# Altium PCB main.PcbDoc
Units mm, origin at the board's own origin, x right, y up, seen from the top; angles counter-clockwise.
Board outline 70 x 55 mm, 2 copper layers (Top Layer, Bottom Layer); 39 components, 31 nets, 118 pads, 29 vias.
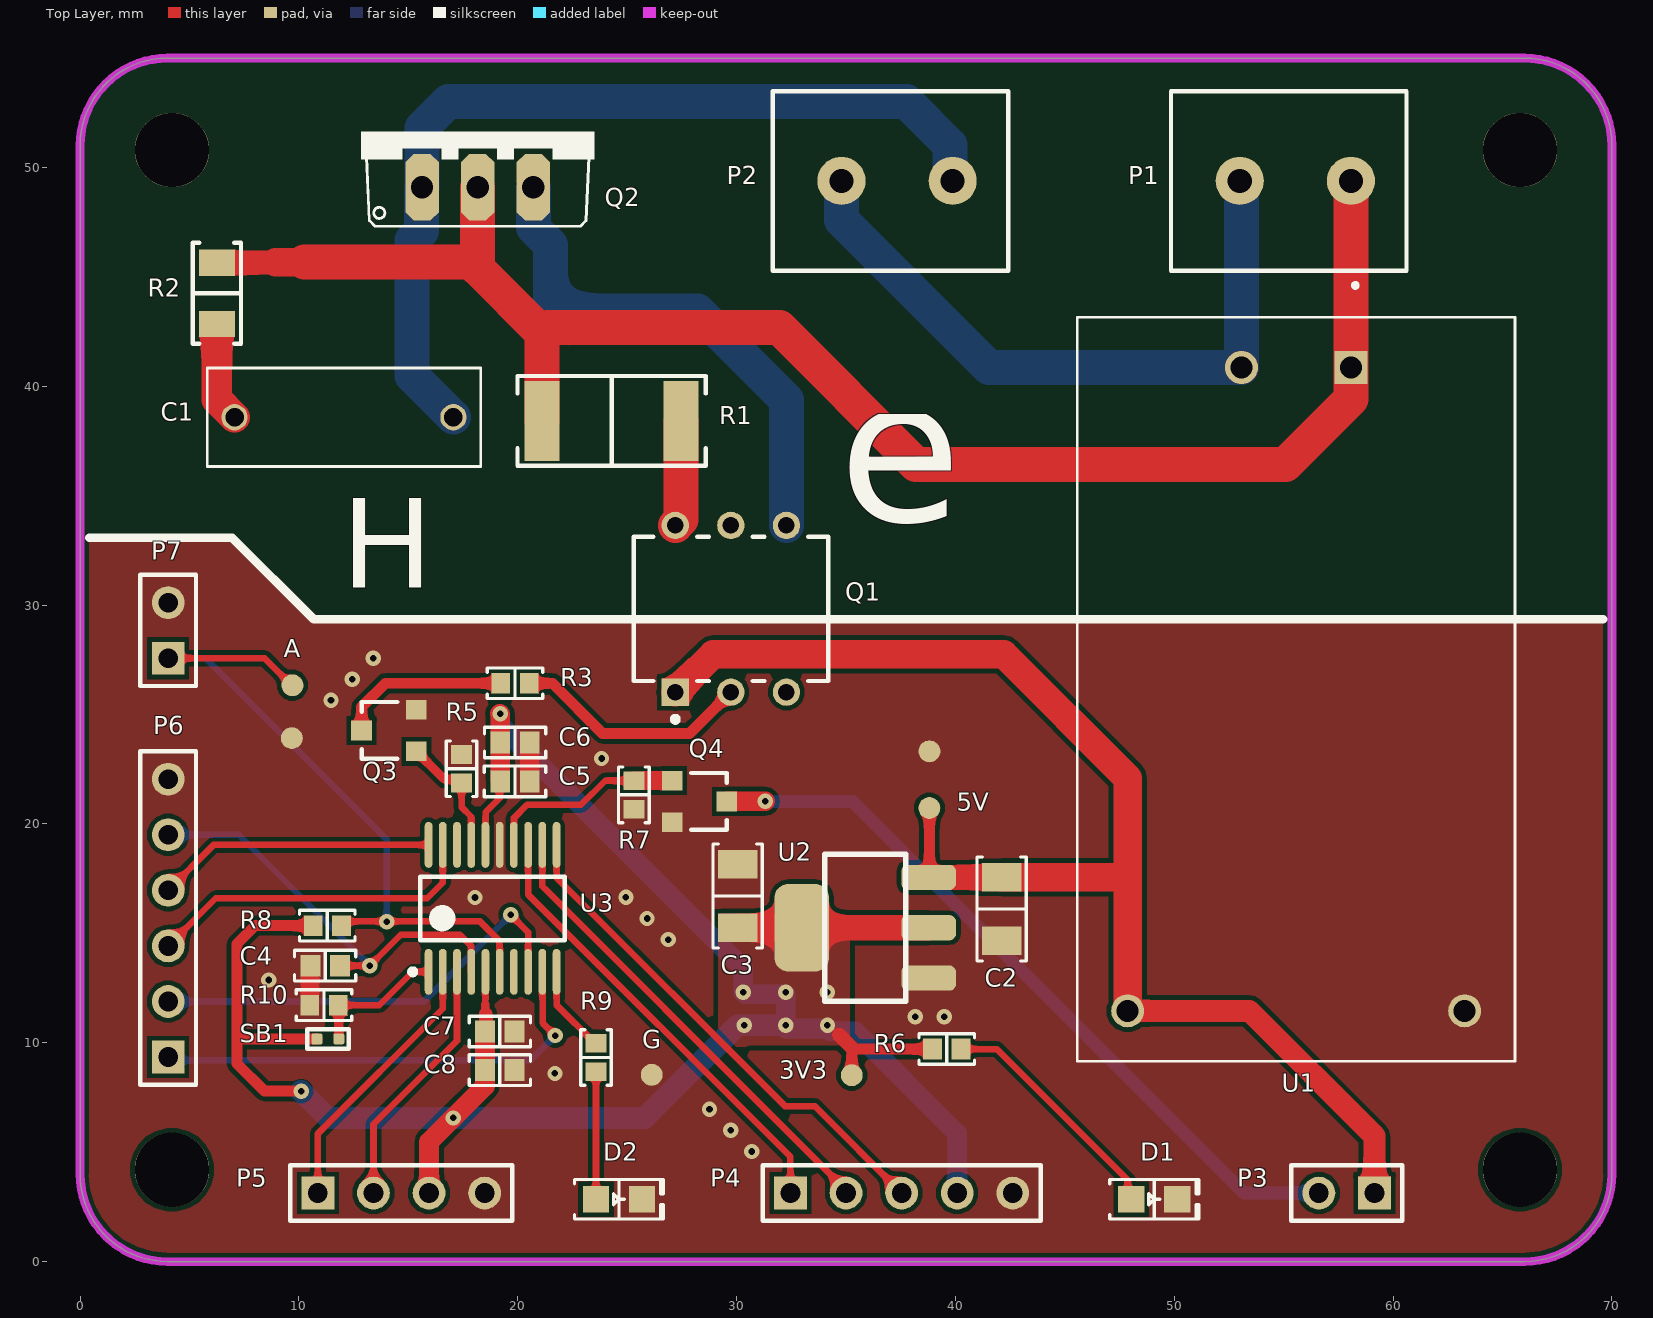
[diagram p0: Top Layer view]
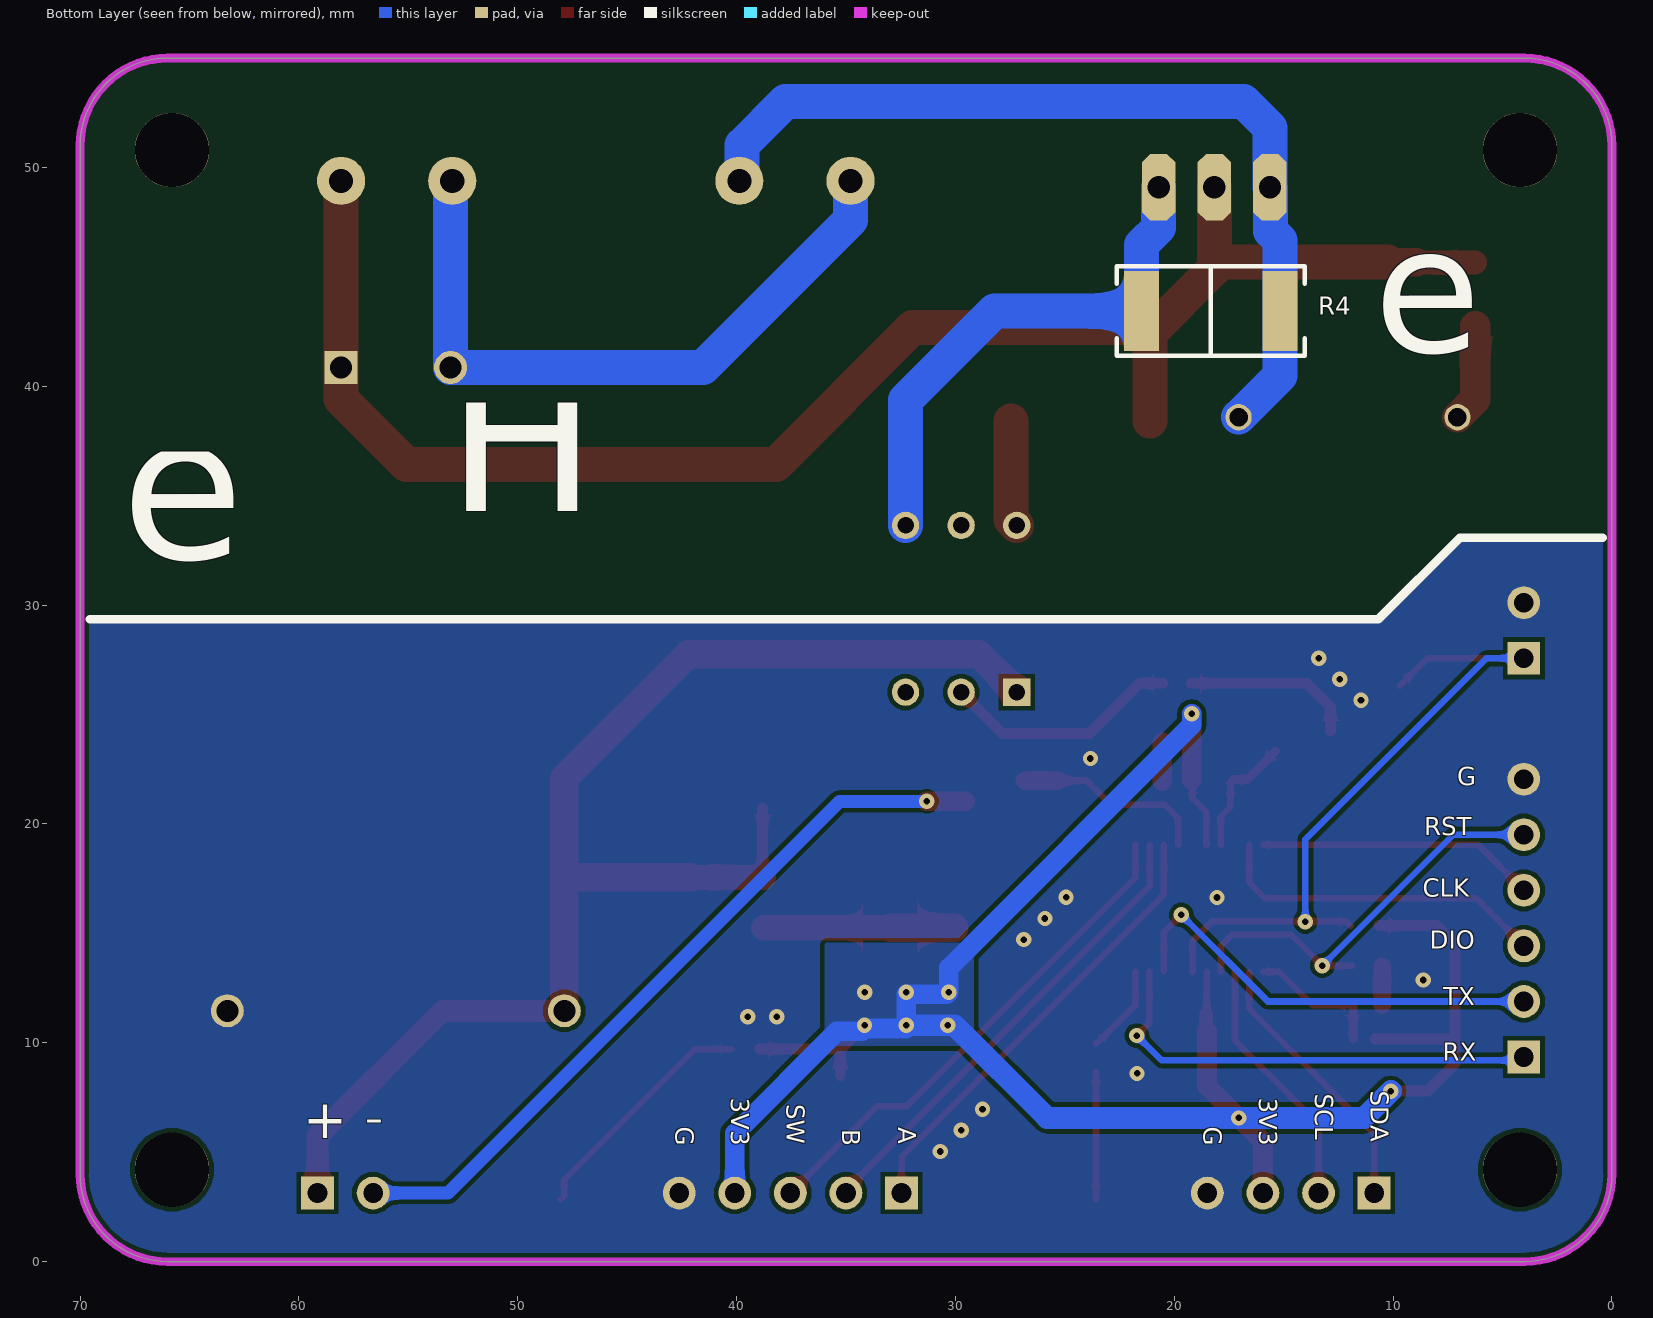
[diagram p1: Bottom Layer view, seen from below]
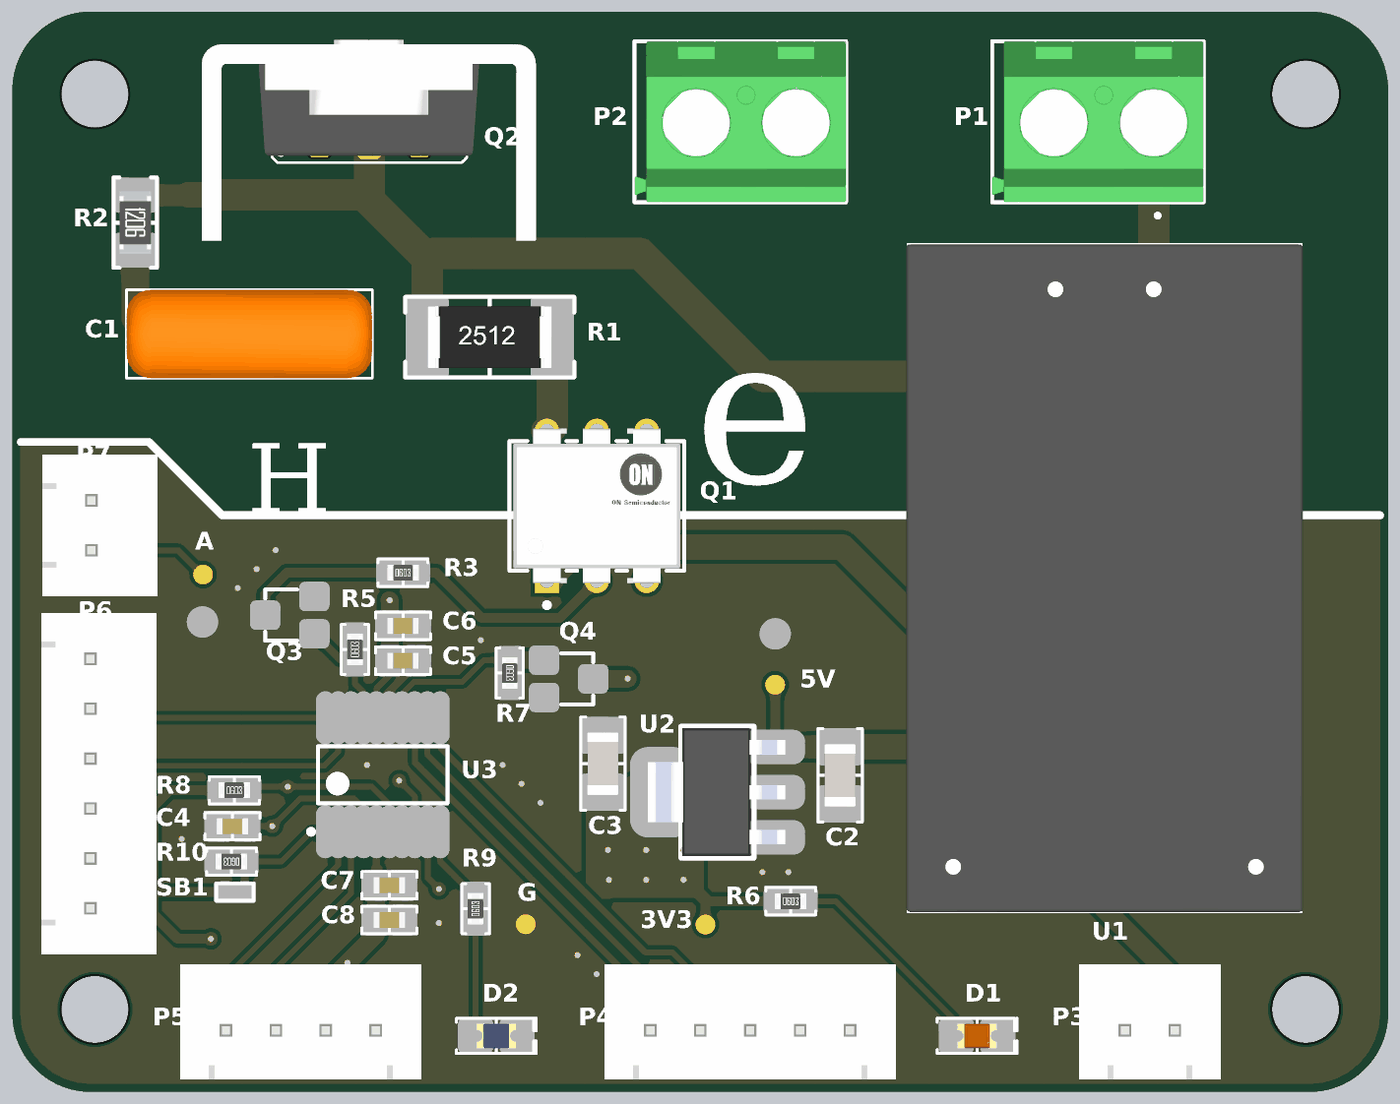
[diagram p2: 3D render of the assembled board from above, using the file's embedded part models]

## Layer stack, top to bottom
Top Solder: solder mask 0.0102, Solder Resist, Dk 3.5
Top Layer: signal copper 0.0356
Dielectric 1: dielectric 0.32, FR-4, Dk 4.8
Bottom Layer: signal copper 0.0356
Bottom Solder: solder mask 0.0102, Solder Resist, Dk 3.5

## Board outline
4,0 cw(c4,4) 0,4 0,51 cw(c4,51) 4,55 66,55 cw(c66,51) 70,51 70,4 cw(c66,4) 66,0

## Design rules (kind name [scope] priority, off if disabled: settings)
Clearance [All] p1: gap=0.2 ignorepadtopadclearanceinfootprint=FALSE
ComponentClearance ComponentClearance_1 [All] p1: gap=0.254 collisioncheckmode=3 verticalgap=0.254 showdistances=FALSE
HoleSize [All] p1: absolutevalues=TRUE maxlimit=10 minlimit=0.025 maxpercent=80.000 minpercent=20.000
MinimumSolderMaskSliver [All] p1: minsoldermaskwidth=0.075
PasteMaskExpansion [All] p1: expansion=0.3
PlaneConnect [All] p1: planeconnectstyle=Direct reliefexpansion=0.508 reliefentries=4 reliefconductorwidth=0.254 reliefairgap=0.254
PolygonConnect [All] p1: connectstyle=Direct reliefconductorwidth=0.254 reliefentries=4 polygonreliefangle="90 Angle" airgapwidth=0.254
RoutingCorners [All] p1: cornerstyle=45-Degree minsetback=2 maxsetback=2
RoutingVias [All] p1: holewidth=0.3 width=0.7 viastyle="Through Hole" minholewidth=0.25 minwidth=0.6 maxholewidth=0.4 maxwidth=1.27
SilkToSilkClearance [All] p1: silktosilkclearance=0.2
SilkToSolderMaskClearance [IsText] p1: minsilkscreentomaskgap=0.17 clearancetoexposedcopper=TRUE
SolderMaskExpansion [All] p1: expansion=0.102 istentingtop=FALSE
UnConnectedPin [All] p1:
UnRoutedNet [All] p1: checkbadconnections=TRUE
Width [All] p1: maxlimit=5 minlimit=0.2 preferedwidth=0.3 minimp=50.000000 maximp=50.000000 favimp=50.000000
21 further rules are at their usual default settings.

## Components (designator, comment, footprint, x,y, rotation, side; value= is the part's Value field where it differs from the comment)
3V3 "TP_NOBOM" PAD_RND_1MM 35.263,8.521 r90 top (schematic designator TP3)
5V "TP_NOBOM" PAD_RND_1MM 38.81,20.731 r45 top (schematic designator TP1)
A "TP_NOBOM" PAD_RND_1MM 9.704,26.339 r90 top (schematic designator TP4)
C1 "0.01u" CAPRR1000W60L1250T450H750 12.058,38.588 r0 top
C2 "10u" "CAP 1206_3216 - 0.8MM" 42.116,16.119 r270 top value="10 µF"
C3 "22u" "CAP 1206_3216 - 0.8MM" 30.046,16.709 r90 top value="22 µF"
C4 "0.1u" "CAP 0603_1608" 11.2,13.525 r180 top value="0.1 µF"
C5 "0.1u" "CAP 0603_1608" 19.875,21.95 r0 top value="0.1 µF"
C6 "4.7u" "CAP 0603_1608" 19.876,23.725 r0 top value="4.7 µF"
C7 "1u" "CAP 0603_1608" 19.18,10.52 r0 top value="1 µF"
C8 "0.01u" "CAP 0603_1608" 19.18,8.752 r0 top value="10000 pF"
D1 "Red" "LED 0805_2012 RED" 49.085,2.853 r0 top
D2 "Blue" "LED 0805_2012 BLUE" 24.626,2.853 r0 top
G "TP_NOBOM" PAD_RND_1MM 26.121,8.538 r45 top (schematic designator TP2)
P1 "282837-2" "TE 282837-2" 55.532,49.39 r180 top
P2 "282837-2" "TE 282837-2" 37.334,49.39 r180 top
P3 "Header 2" HDR1X2 59.149,3.136 r180 top
P4 "Header 5" HDR1X5 32.462,3.136 r0 top
P5 "Header 4" HDR1X4 10.866,3.136 r0 top
P6 "Header 6" HDR1X6 4.025,9.349 r90 top
P7 "Header 2" HDR1X2 4.025,27.575 r90 top
Q1 "MOC3041M" FP-646BX-MFG 29.738,29.835 r90 top
Q2 "BT138" MY_TO220V_HEATSINK 18.17,51.634 r0 top
Q3 "AO3400" AO-SOT23-3_V 14.116,24.273 r90 top
Q4 "AO3400" AO-SOT23-3_V 28.305,21.031 r270 top
R1 "360" "RES 2512_6432" 24.291,38.424 r0 top value="360 Ohms"
R2 "39" "RES 1206_3216" 6.251,44.253 r270 top value="39 Ohms"
R3 "100" "RES 0603_1608" 19.875,26.431 r0 top value="100 Ohms"
R4 "360" "RES 2512_6432" 18.331,43.439 r180 bottom value="360 Ohms"
R5 "10k" "RES 0603_1608" 17.431,22.525 r90 top value="10 kOhms"
R6 "1k" "RES 0603_1608" 39.604,9.715 r0 top value="1 kOhms"
R7 "10k" "RES 0603_1608" 25.308,21.331 r270 top value="10 kOhms"
R8 "100k" "RES 0603_1608" 11.297,15.354 r0 top value="100 kOhms"
R9 "1k" "RES 0603_1608" 23.576,9.327 r90 top value="1 kOhms"
R10 "10k" "RES 0603_1608" 11.15,11.722 r180 top value="10 kOhms"
SB1 "Solder Jumper" SOLDERJUMPER_SINGLE 11.325,10.175 r0 top
U1 "HLK-PM01" CONV_HLK-PM01 55.572,26.161 r270 top
U2 "AMS1117-3.3V" SOT-223 37.732,15.259 r90 top
U3 "STM32F070F6P6" STM-TSSOP20_M 18.849,16.146 r90 top

## Footprints (in the part's own frame and the unit in brackets; to place one, negate y for a bottom-side part, rotate by r counter-clockwise, add the part's x,y. Pads: shape width x height; smd on the part's side, far side on the other; paste and mask are expansions set on the pad)
AO-SOT23-3_V [mm]
  rect 0.9x0.95 smd: 1(-0.95,-1.25) 2(0.95,-1.25) 3(0,1.25)
  silkscreen extent -1.3,-0.38 1.3,1.25, body extent -1.14,-1.25 1.17,1.36, height 1.25
"CAP 0603_1608" [mm]
  rect 0.9x1 smd: 1(-0.675,0) 2(0.675,0)
  silkscreen extent -1.4,-0.7 1.4,0.7, body extent -0.8,-0.41 0.8,0.41, height 0.82
"CAP 1206_3216 - 0.8MM" [mm]
  rect 1.3x1.8 smd: 1(-1.45,0) 2(1.45,0)
  silkscreen extent -2.37,-1.12 2.37,1.12, body extent -1.6,-0.8 1.6,0.8, height 0.8
CAPRR1000W60L1250T450H750 [mm]
  round 1.2 hole 0.85: 1(-5,0) 2(5,0)
  silkscreen extent -6.25,-2.25 6.25,2.25, body extent -6.25,-2.25 6.25,2.25, height 8.5
CONV_HLK-PM01 [mm]
  rect 1.508x1.508 hole 1: 1(-14.7,2.5)
  round 1.508 hole 1: 2(-14.7,-2.5) 3(14.7,7.7) 4(14.7,-7.7)
  silkscreen extent -18.55,-10 17,10, body extent -17,-10.1 17,10.1, height 15
FP-646BX-MFG [mm]
  rect 1.25x1.25 hole 0.75 paste-1000 mask+0: 1(-3.81,2.54)
  round 1.25 hole 0.75 paste-1000 mask+0: 2(-3.81,0) 3(-3.81,-2.54) 4(3.81,-2.54) 5(3.81,0) 6(3.81,2.54)
  silkscreen extent -5.17,-4.44 3.3,4.44, body extent -4.53,-4.54 4.53,4.54, height 0.25
HDR1X2 [mm]
  rect 1.5x1.5 hole 0.9: 1(0,0)
  round 1.5 hole 0.9: 2(2.54,0)
  silkscreen extent -1.27,-1.27 3.81,1.27, body extent -2.34,-3.35 4.88,2.49, height 7.44
HDR1X4 [mm]
  rect 1.5x1.5 hole 0.9: 1(0,0)
  round 1.5 hole 0.9: 2(2.54,0) 3(5.08,0) 4(7.62,0)
  silkscreen extent -1.27,-1.27 8.89,1.27, body extent -2.34,-2.49 9.96,3.35, height 7.47
HDR1X5 [mm]
  rect 1.5x1.5 hole 0.9: 1(0,0)
  round 1.5 hole 0.9: 2(2.54,0) 3(5.08,0) 4(7.62,0) 5(10.16,0)
  silkscreen extent -1.27,-1.27 11.43,1.27, body extent -2.34,-2.49 12.5,3.35, height 7.47
HDR1X6 [mm]
  rect 1.5x1.5 hole 0.9: 1(0,0)
  round 1.5 hole 0.9: 2(2.54,0) 3(5.08,0) 4(7.62,0) 5(10.16,0) 6(12.7,0)
  silkscreen extent -1.27,-1.27 13.97,1.27, body extent -2.34,-3.3 15.04,2.54, height 7.47
"LED 0805_2012 BLUE" [mm]
  rect 1.2x1.2 smd: 1(-1.05,0) 2(1.05,0)
  silkscreen extent -2.03,-0.9 2.03,0.9, body extent -1,-0.62 1,0.63, height 0.9
"LED 0805_2012 RED" [mm]
  rect 1.2x1.2 smd: 1(-1.05,0) 2(1.05,0)
  silkscreen extent -2.03,-0.9 2.03,0.9, body extent -1,-0.62 1,0.63, height 0.9
MY_TO220V_HEATSINK [mil]
  oct 60x120 hole 40: 1(-100,-100) 2(0,-100) 3(100,-100)
  silkscreen extent -210,-170 210,0, body extent -336,-327 333,76, height 806
PAD_RND_1MM [mm]
  round 1 smd paste-0.5 mask+0: 1(0,0)
"RES 0603_1608" [mm]
  rect 0.85x0.95 smd: 1(-0.65,0) 2(0.65,0)
  silkscreen extent -1.27,-0.7 1.27,0.7, body extent -0.8,-0.4 0.8,0.4, height 0.45
"RES 1206_3216" [mm]
  rect 1.2x1.65 smd: 1(-1.4,0) 2(1.4,0)
  silkscreen extent -2.3,-1.1 2.3,1.1, body extent -1.6,-0.8 1.6,0.8, height 0.6
"RES 2512_6432" [mm]
  rect 1.6x3.65 smd: 1(-3.175,0) 2(3.175,0)
  silkscreen extent -4.3,-2.05 4.3,2.05, body extent -3.15,-1.58 3.15,1.57, height 0.7
SOLDERJUMPER_SINGLE [mm]
  rrect35% 0.5x0.5 smd mask+0: 1(-0.5,0) 2(0.5,0)
  silkscreen extent -0.95,-0.44 0.95,0.44
SOT-223 [mm]
  rrect50% 1.15x2.5 smd: 1(-2.3,-1.045) 2(0,-1.045) 3(2.3,-1.045)
  rrect50% 4x2.5 smd: 2(0,4.755)
  silkscreen extent -3.35,0 3.35,3.71, body extent -3.25,-1.59 3.25,5.4, height 1.8
STM-TSSOP20_M [mm]
  oval 2.1x0.35 smd: 1(-2.9,2.925) 2(-2.9,2.275) 3(-2.9,1.625) 4(-2.9,0.975) 5(-2.9,0.325) 6(-2.9,-0.325) 7(-2.9,-0.975) 8(-2.9,-1.625) 9(-2.9,-2.275) 10(-2.9,-2.925) 11(2.9,-2.925) 12(2.9,-2.275) 13(2.9,-1.625) 14(2.9,-0.975) 15(2.9,-0.325) 16(2.9,0.325) 17(2.9,0.975) 18(2.9,1.625) 19(2.9,2.275) 20(2.9,2.925)
  silkscreen extent -3.02,-3.3 1.45,3.77, body extent -2.25,-3.3 2.25,3.3, height 1.2
"TE 282837-2" [mm]
  round 2.2 hole 1.1: 1(-2.54,0) 2(2.54,0)
  silkscreen extent -5.08,-4.1 5.68,4.1, body extent -5.08,-4.1 5.68,4.1, height 10.3

## Part data
3V3 5V A G: library part TEST_POINT_RND_1MM, "Test Point Round 1mm (NO BOM)"
C1: library part ECQE6103KT, "ECQE6103KT", Package=None, Availability=Unavailable, MF="{'manufacturer': u'Panasonic'}", MP=ECQE6103KT, price=None
C2: library part CL31B106KOHVPNE, "CAP CER 10UF 16V X7R 1206", Capacitance="10 µF", Device Package="1206 (3216 Metric)", manufacturer="Samsung Electro-Mechanics", Operating Temperature="-55°C ~ 125°C", Ratings=AEC-Q200, Supplier Part Number 1=1276-6797-1-ND, Temperature Coefficient=X7R, Tolerance=±10%, Voltage - Rated=16V, Applications=Automotive, componentlink1description=Datasheet, componentlink1url=http://www.samsungsem.com/kr/support/product-search/mlcc/CL31B106KOHVPNE.jsp, componentlink2description="DigiKey Link", componentlink2url=https://www.digikey.com/en/products/detail/samsung-electro-mechanics/CL31B106KOHVPNE/5961281, lastupdated="6/4/2024 7:10:40 PM", Lifecycle Status=Active, Minimum Order=1, Mounting Type="Surface Mount, MLCC", Package / Case="1206 (3216 Metric)", packaging=TapeAndReel, Part Number=CL31B106KOHVPNE, Part Status=Active, partid=20135, price=0.06, series=CL, Size / Dimension="0.126\" L x 0.063\" W (3.20mm x 1.60mm)", Supplier 1=DigiKey, Thickness (Max)="0.071\" (1.80mm)"
C3: library part CL31A226KOCLFNC, "CAP CER 22UF 16V X5R 1206", Capacitance="22 µF", Device Package="1206 (3216 Metric)", manufacturer="Samsung Electro-Mechanics", Operating Temperature="-55°C ~ 85°C", Supplier Part Number 1=1276-2725-1-ND, Temperature Coefficient=X5R, Tolerance=±10%, Voltage - Rated=16V, Applications="General Purpose", componentlink1description=Datasheet, componentlink1url=http://www.samsungsem.com/kr/support/product-search/mlcc/CL31A226KOCLFNC.jsp, componentlink2description="DigiKey Link", componentlink2url=https://www.digikey.com/en/products/detail/samsung-electro-mechanics/CL31A226KOCLFNC/3888383, lastupdated="6/4/2024 7:10:41 PM", Lifecycle Status=Active, Minimum Order=1, Mounting Type="Surface Mount, MLCC", Package / Case="1206 (3216 Metric)", packaging=TapeAndReel, Part Number=CL31A226KOCLFNC, Part Status=Active, partid=18940, price=0.09, series=CL, Size / Dimension="0.126\" L x 0.063\" W (3.20mm x 1.60mm)", Supplier 1=DigiKey, Thickness (Max)="0.037\" (0.95mm)"
C4 C5: library part CL10B104KB8NNNL, "CAP CER 0.1UF 50V X7R 0603", Capacitance="0.1 µF", Device Package="0603 (1608 Metric)", manufacturer="Samsung Electro-Mechanics", Operating Temperature="-55°C ~ 125°C", Supplier Part Number 1=1276-CL10B104KB8NNNLCT-ND, Temperature Coefficient=X7R, Tolerance=±10%, Voltage - Rated=50V, Applications="General Purpose", componentlink1description=Datasheet, componentlink1url=http://www.samsungsem.com/kr/support/product-search/mlcc/CL10B104KB8NNNL.jsp, componentlink2description="DigiKey Link", componentlink2url=https://www.digikey.com/en/products/detail/samsung-electro-mechanics/CL10B104KB8NNNL/3894274, lastupdated="2/9/2024 8:10:29 PM", Lifecycle Status=Active, Minimum Order=1, Mounting Type="Surface Mount, MLCC", Package / Case="0603 (1608 Metric)", packaging=TapeAndReel, Part Number=CL10B104KB8NNNL, Part Status=Active, partid=3517, price=0.01, series=CL, Size / Dimension="0.063\" L x 0.031\" W (1.60mm x 0.80mm)", Supplier 1=DigiKey, Thickness (Max)="0.035\" (0.90mm)"
C6: library part CL10A475KL8NRNC, "CAP CER 4.7UF 35V X5R 0603", Capacitance="4.7 µF", Device Package="0603 (1608 Metric)", manufacturer="Samsung Electro-Mechanics", Operating Temperature="-55°C ~ 85°C", Supplier Part Number 1=1276-6794-1-ND, Temperature Coefficient=X5R, Tolerance=±10%, Voltage - Rated=35V, Applications="General Purpose", componentlink1description=Datasheet, componentlink1url=http://www.samsungsem.com/kr/support/product-search/mlcc/CL10A475KL8NRNC.jsp, componentlink2description="DigiKey Link", componentlink2url=https://www.digikey.com/en/products/detail/samsung-electro-mechanics/CL10A475KL8NRNC/5961278, lastupdated="2/9/2024 8:10:30 PM", Lifecycle Status=Active, Minimum Order=1, Mounting Type="Surface Mount, MLCC", Package / Case="0603 (1608 Metric)", packaging=TapeAndReel, Part Number=CL10A475KL8NRNC, Part Status=Active, partid=2652, price=0.08, series=CL, Size / Dimension="0.063\" L x 0.031\" W (1.60mm x 0.80mm)", Supplier 1=DigiKey, Thickness (Max)="0.035\" (0.90mm)"
C7: library part CL10A105KO8NNNC, "CAP CER 1UF 16V X5R 0603", Capacitance="1 µF", Device Package="0603 (1608 Metric)", manufacturer="Samsung Electro-Mechanics", Operating Temperature="-55°C ~ 85°C", Supplier Part Number 1=1276-1034-1-ND, Temperature Coefficient=X5R, Tolerance=±10%, Voltage - Rated=16V, Applications="General Purpose", componentlink1description=Datasheet, componentlink1url=http://www.samsungsem.com/kr/support/product-search/mlcc/CL10A105KO8NNNC.jsp, componentlink2description="DigiKey Link", componentlink2url=https://www.digikey.com/en/products/detail/samsung-electro-mechanics/CL10A105KO8NNNC/3886692, lastupdated="2/9/2024 8:10:26 PM", Lifecycle Status=Active, Minimum Order=1, Mounting Type="Surface Mount, MLCC", Package / Case="0603 (1608 Metric)", packaging=TapeAndReel, Part Number=CL10A105KO8NNNC, Part Status=Active, partid=5514, price=0.01, series=CL, Size / Dimension="0.063\" L x 0.031\" W (1.60mm x 0.80mm)", Supplier 1=DigiKey, Thickness (Max)="0.035\" (0.90mm)"
C8: library part CL10B103KC8NNNC, "CAP CER 10000PF 100V X7R 0603", Capacitance="10000 pF", Device Package="0603 (1608 Metric)", manufacturer="Samsung Electro-Mechanics", Operating Temperature="-55°C ~ 125°C", Supplier Part Number 1=1276-1196-1-ND, Temperature Coefficient=X7R, Tolerance=±10%, Voltage - Rated=100V, Applications="General Purpose", componentlink1description=Datasheet, componentlink1url=http://www.samsungsem.com/kr/support/product-search/mlcc/CL10B103KC8NNNC.jsp, componentlink2description="DigiKey Link", componentlink2url=https://www.digikey.com/en/products/detail/samsung-electro-mechanics/CL10B103KC8NNNC/3886854, lastupdated="2/9/2024 8:10:26 PM", Lifecycle Status=Active, Minimum Order=1, Mounting Type="Surface Mount, MLCC", Package / Case="0603 (1608 Metric)", packaging=TapeAndReel, Part Number=CL10B103KC8NNNC, Part Status=Active, partid=5732, price=0.01, series=CL, Size / Dimension="0.063\" L x 0.031\" W (1.60mm x 0.80mm)", Supplier 1=DigiKey, Thickness (Max)="0.035\" (0.90mm)"
D1: library part VFHV1112H-3BZ2B-TR, "LED", Current - Test=20mA, Device Package="0805 (2012 Metric)", Lens Color=White, manufacturer="Stanley Electric Co", Millicandela Rating=110mcd, Supplier Part Number 1=404-1314-1-ND, Voltage - Forward (Vf) (Typ)=1.9V, Color=Red, componentlink1description=Datasheet, componentlink1url=http://www.stanley-components.com/php/downloaddatafile.php?rp=0,VFHV1112H-3BZ2B-TR_e.pdf, componentlink2description="DigiKey Link", componentlink2url=http://digikey.com/product-detail/en/stanley-electric-co/VFHV1112H-3BZ2B-TR/404-1314-1-ND/9477319, Configuration=Standard, Height (Max)=0.90mm, lastupdated="6/3/2024 8:00:06 PM", Lens Size="1.30mm x 1.25mm", Lens Style="Rectangle with Flat Top", Lifecycle Status=Active, Minimum Order=1, Mounting Type="Surface Mount", Package / Case="0805 (2012 Metric)", packaging=TapeAndReel, Part Number=VFHV1112H-3BZ2B-TR, Part Status=Active, partid=359, price=0.08, series=-, Size / Dimension="2.00mm L x 1.25mm W", Supplier 1=DigiKey, Viewing Angle=140°, Wavelength - Dominant=615nm, Wavelength - Peak=624nm
D2: library part XZFBB54W-8, "LED BLUE CLEAR CHIP SMD", Current - Test=20mA, Device Package="0805 (2012 Metric)", Lens Color=Colorless, manufacturer=SunLED, Millicandela Rating=597mcd, Supplier Device Package="Chip LED", Supplier Part Number 1=1497-1437-1-ND, Voltage - Forward (Vf) (Typ)=3.3V, Color=Blue, componentlink1description=Datasheet, componentlink1url=https://www.sunledusa.com/products/spec/XZFBB54W-8.pdf, componentlink2description="DigiKey Link", componentlink2url=https://www.digikey.com/en/products/detail/sunled/XZFBB54W-8/8259044, Configuration=Standard, Height (Max)=1.20mm, lastupdated="6/3/2024 7:58:02 PM", Lens Size="0.80mm Dia", Lens Style="Round with Domed Top", Lens Transparency=Clear, Lifecycle Status=Active, Minimum Order=1, Mounting Type="Surface Mount", Package / Case="0805 (2012 Metric)", packaging=TapeAndReel, Part Number=XZFBB54W-8, Part Status=Active, partid=757, price=0.15, series=-, Size / Dimension="2.00mm L x 1.25mm W", Supplier 1=DigiKey, Viewing Angle=30°, Wavelength - Dominant=470nm, Wavelength - Peak=465nm
P1 P2: "TERM BLK 2P SIDE ENT 5.08MM PCB", Color=Green, Current="13.5 A", manufacturer="TE Connectivity AMP Connectors", Supplier Part Number 1=A113320-ND, Voltage="300 V", componentlink1description=Datasheet, componentlink1url=https://www.te.com/commerce/DocumentDelivery/DDEController?Action=srchrtrv&DocNm=282837&DocType=Customer+Drawing&DocLang=English, componentlink2description="DigiKey Link", componentlink2url=https://www.digikey.com/en/products/detail/te-connectivity-amp-connectors/282837-2/2187973, Features="Interlocking (Side)", lastupdated="6/21/2022 3:00:23 PM", Lifecycle Status=Active, Mating Orientation="Horizontal with Board", Minimum Order=1, Mounting Type="Through Hole", Number of Levels=1, packaging=Tray, Part Number=282837-2, Part Status=Active, Pitch="0.200\" (5.08mm)", Positions Per Level=2, price=0.31, series=Buchanan, Supplier 1=DigiKey, Wire Gauge="16-28 AWG", Wire Termination="Screw - Rising Cage Clamp"
P3 P7: "Header, 2-Pin", LatestRevisionDate=17-Jul-2002, LatestRevisionNote="Re-released for DXP Platform.", Publisher="Altium Limited"
P4: "Header, 5-Pin", LatestRevisionDate=17-Jul-2002, LatestRevisionNote="Re-released for DXP Platform.", Publisher="Altium Limited"
P5: "Header, 4-Pin", LatestRevisionDate=17-Jul-2002, LatestRevisionNote="Re-released for DXP Platform.", Publisher="Altium Limited"
P6: "Header, 6-Pin", LatestRevisionDate=17-Jul-2002, LatestRevisionNote="Re-released for DXP Platform.", Publisher="Altium Limited"
Q1: library part CMP-07144-000005-1, "OPTOISOLATOR 4.17KV TRIAC 6DIP", Forward Current=30mA, Forward Voltage=1.25V, Isolation Voltage=4170Vrms, manufacturer="ON Semiconductor", Max Junction Temp=+100°C, Package=646BX, Power Dissipation=250mW, Reverse Voltage=6V, Temperature="-40°C to +85°C", Temperature Range High=+85°C, Temperature Range Low=-40°C, Automotive=No, Category=Trans, componentlink2description=Datasheet, componentlink2url=https://www.onsemi.com/pub/Collateral/MOC3043M-D.pdf, Device Class L1=Optoelectronics, Device Class L2=Optocouplers, Device Class L3=unset, Digikey Description="OPTOISOLATOR 4.17KV TRIAC 6DIP", Footprint Url=https://www.onsemi.com/pub/Collateral/646BX.PDF, Height=5.08mm, Lead Free=Yes, Manufacturer Part Number=MOC3041M, Mouser Description="Optocoupler Triac AC Output 1 Channel 400VDRM 6-Pin Plastic Dip White Bulk", Octopart=https://octopart.com/moc3041m-on+semiconductor-84330395, RoHS=TRUE, Standoff Height=0.38mm
Q2: "Silicon Bidirectional Triode Thyristor", ASiD Part Number=BT138-AS
Q3 Q4: library part CMP-0278-00001-1, "N-channel Enhancement Mode Field-Effect Transistor; 5.8A/30V", Drain-Source Voltage Limit="30 V", Gate-Source Voltage Limit="+/-12 V", Junction Temperature="-55 to 150 degC", manufacturer="Alpha and Omega", Channel Type=N, componentlink1description="Manufacturer URL", componentlink1url=http://www.aosmd.com/, componentlink2description=Datasheet, componentlink2url=http://www.aosmd.com/res/data_sheets/AO3400.pdf, componentlink3description="Package Specification", componentlink3url=http://www.aosmd.com/res/packaging_information/SOT-23.pdf, DatasheetVersion="Rev.8, 12/2011", Mounting Technology="Surface Mount", PackageDescription="3-Pin SOT23, 3.016 x 2.8 mm Body, 0.95 mm Pitch", PackageReference=SOT23, PartNumber=AO3400, Storage Temperature="-55 to 150 degC"
R1 R4: library part RMCF2512FT360R, "RES 360 OHM 1% 1W 2512", Device Package="2512 (6432 Metric)", manufacturer="Stackpole Electronics Inc", Operating Temperature="-55°C ~ 155°C", Power (Watts)=1W, Ratings=AEC-Q200, Resistance="360 Ohms", Supplier Device Package=2512, Supplier Part Number 1=RMCF2512FT360RCT-ND, Temperature Coefficient=±100ppm/°C, Tolerance=±1%, componentlink1description=Datasheet, componentlink1url=https://www.seielect.com/catalog/sei-rmcf_rmcp.pdf, componentlink2description="DigiKey Link", componentlink2url=http://digikey.com/product-detail/en/stackpole-electronics-inc/RMCF2512FT360R/RMCF2512FT360RCT-ND/7907116, Composition="Thick Film", Features="Automotive AEC-Q200", Height - Seated (Max)="0.028\" (0.70mm)", lastupdated="9/2/2020 1:26:55 AM", Lifecycle Status=Active, Minimum Order=1, Number of Terminations=2, Package / Case="2512 (6432 Metric)", packaging=TapeAndReel, Part Number=RMCF2512FT360R, Part Status=Active, price=0.04, series=RMCF, Size / Dimension="0.248\" L x 0.126\" W (6.30mm x 3.20mm)", Supplier 1=DigiKey
R2: library part RMCF1206JT39R0, "RES 39 OHM 5% 1/4W 1206", Device Package="1206 (3216 Metric)", manufacturer="Stackpole Electronics Inc", Operating Temperature="-55°C ~ 155°C", Power (Watts)="0.25W, 1/4W", Ratings=AEC-Q200, Resistance="39 Ohms", Supplier Device Package=1206, Supplier Part Number 1=RMCF1206JT39R0CT-ND, Temperature Coefficient=±200ppm/°C, Tolerance=±5%, componentlink1description=Datasheet, componentlink1url=https://www.seielect.com/catalog/sei-rmcf_rmcp.pdf, componentlink2description="DigiKey Link", componentlink2url=https://www.digikey.com/en/products/detail/stackpole-electronics-inc/RMCF1206JT39R0/1753828, Composition="Thick Film", Features="Automotive AEC-Q200", Height - Seated (Max)="0.028\" (0.70mm)", lastupdated="2/9/2024 8:54:36 PM", Lifecycle Status=Active, Minimum Order=1, Number of Terminations=2, Package / Case="1206 (3216 Metric)", packaging=CutTape, Part Number=RMCF1206JT39R0, Part Status=Active, partid=28850, price=0.01, series=RMCF, Size / Dimension="0.126\" L x 0.063\" W (3.20mm x 1.60mm)", Supplier 1=DigiKey
R3: library part RNCS0603BKE100R, "RES 100 OHM 0.1% 1/16W 0603", Device Package="0603 (1608 Metric)", manufacturer="Stackpole Electronics Inc", Operating Temperature="-55°C ~ 155°C", Power (Watts)="0.063W, 1/16W", Ratings=AEC-Q200, Resistance="100 Ohms", Supplier Device Package=0603, Supplier Part Number 1=RNCS0603BKE100RCT-ND, Temperature Coefficient=±25ppm/°C, Tolerance=±0.1%, componentlink1description=Datasheet, componentlink1url=https://www.seielect.com/catalog/sei-rncs_rnch.pdf, componentlink2description="DigiKey Link", componentlink2url=https://www.digikey.com/en/products/detail/stackpole-electronics-inc/RNCS0603BKE100R/1799988, Composition="Thin Film", Features="Anti-Corrosive, Automotive AEC-Q200, Moisture Resistant", Height - Seated (Max)="0.022\" (0.55mm)", lastupdated="2/9/2024 8:43:37 PM", Lifecycle Status=Active, Minimum Order=1, Number of Terminations=2, Package / Case="0603 (1608 Metric)", packaging=TapeAndReel, Part Number=RNCS0603BKE100R, Part Status=Active, partid=4839, price=0.06, series=RNCS, Size / Dimension="0.061\" L x 0.031\" W (1.55mm x 0.80mm)", Supplier 1=DigiKey
R5 R7 R10: library part RNCS0603BKE10K0, "RES 10K OHM 0.1% 1/16W 0603", Device Package="0603 (1608 Metric)", manufacturer="Stackpole Electronics Inc", Operating Temperature="-55°C ~ 155°C", Power (Watts)="0.063W, 1/16W", Ratings=AEC-Q200, Resistance="10 kOhms", Supplier Device Package=0603, Supplier Part Number 1=RNCS0603BKE10K0CT-ND, Temperature Coefficient=±25ppm/°C, Tolerance=±0.1%, componentlink1description=Datasheet, componentlink1url=https://www.seielect.com/catalog/sei-rncs_rnch.pdf, componentlink2description="DigiKey Link", componentlink2url=https://www.digikey.com/en/products/detail/stackpole-electronics-inc/RNCS0603BKE10K0/1708836, Composition="Thin Film", Features="Anti-Corrosive, Automotive AEC-Q200, Moisture Resistant", Height - Seated (Max)="0.022\" (0.55mm)", lastupdated="2/9/2024 8:43:37 PM", Lifecycle Status=Active, Minimum Order=1, Number of Terminations=2, Package / Case="0603 (1608 Metric)", packaging=TapeAndReel, Part Number=RNCS0603BKE10K0, Part Status=Active, partid=4838, price=0.06, series=RNCS, Size / Dimension="0.061\" L x 0.031\" W (1.55mm x 0.80mm)", Supplier 1=DigiKey
R6 R9: library part RNCS0603BKE1K00, "RES 1K OHM 0.1% 1/16W 0603", Device Package="0603 (1608 Metric)", manufacturer="Stackpole Electronics Inc", Operating Temperature="-55°C ~ 155°C", Power (Watts)="0.063W, 1/16W", Ratings=AEC-Q200, Resistance="1 kOhms", Supplier Device Package=0603, Supplier Part Number 1=RNCS0603BKE1K00CT-ND, Temperature Coefficient=±25ppm/°C, Tolerance=±0.1%, componentlink1description=Datasheet, componentlink1url=https://www.seielect.com/catalog/sei-rncs_rnch.pdf, componentlink2description="DigiKey Link", componentlink2url=https://www.digikey.com/en/products/detail/stackpole-electronics-inc/RNCS0603BKE1K00/1708845, Composition="Thin Film", Features="Anti-Corrosive, Automotive AEC-Q200, Moisture Resistant", Height - Seated (Max)="0.022\" (0.55mm)", lastupdated="2/9/2024 8:42:50 PM", Lifecycle Status=Active, Minimum Order=1, Number of Terminations=2, Package / Case="0603 (1608 Metric)", packaging=TapeAndReel, Part Number=RNCS0603BKE1K00, Part Status=Active, partid=16793, price=0.06, series=RNCS, Size / Dimension="0.061\" L x 0.031\" W (1.55mm x 0.80mm)", Supplier 1=DigiKey
R8: library part RNCS0603BKE100K, "RES 100K OHM 0.1% 1/16W 0603", Device Package="0603 (1608 Metric)", manufacturer="Stackpole Electronics Inc", Operating Temperature="-55°C ~ 155°C", Power (Watts)="0.063W, 1/16W", Ratings=AEC-Q200, Resistance="100 kOhms", Supplier Device Package=0603, Supplier Part Number 1=RNCS0603BKE100KCT-ND, Temperature Coefficient=±25ppm/°C, Tolerance=±0.1%, componentlink1description=Datasheet, componentlink1url=https://www.seielect.com/catalog/sei-rncs_rnch.pdf, componentlink2description="DigiKey Link", componentlink2url=https://www.digikey.com/en/products/detail/stackpole-electronics-inc/RNCS0603BKE100K/1708835, Composition="Thin Film", Features="Anti-Corrosive, Automotive AEC-Q200, Moisture Resistant", Height - Seated (Max)="0.022\" (0.55mm)", lastupdated="2/9/2024 8:43:37 PM", Lifecycle Status=Active, Minimum Order=1, Number of Terminations=2, Package / Case="0603 (1608 Metric)", packaging=TapeAndReel, Part Number=RNCS0603BKE100K, Part Status=Active, partid=4849, price=0.06, series=RNCS, Size / Dimension="0.061\" L x 0.031\" W (1.55mm x 0.80mm)", Supplier 1=DigiKey
SB1: library part SolderJumper_Single, "Solder Jumper Single 0.5mm Pitch"
U1: Package=None, Availability=Unavailable, MF="{'manufacturer': u'Hi-link'}", MP=HLK-PM01, price=None
U2: "IC LDO REGULATOR 3.3V 1A SOT223", Output voltage=3.3V, componentlink1description=Datasheet, componentlink1url=http://ams-semitech.com/attachments/File/AMS1117_20120314.pdf, Part Number=AMS1117-3.3V
U3: library part CMP-0304-00145-2, "ARM Cortex-M0 32-bit MCU, 32 KB Flash, 6 KB Internal RAM, 15 I/Os, 20-Pin TSSOP, -40 to 85 degC, Tray", I/Os (High Current)=15, manufacturer=STMicroelectronics, Operating Frequency(F) (Processor speed) (MHz)=48, Package Description="20-Pin Thin Shrink Small Outline Package, Body 6.5 x 4.4 mm, Pitch 0.65 mm", Package Reference=TSSOP20, Supply Voltage(Vcc) min (V)=2.4, componentlink1description="Manufacturer URL", componentlink1url=http://www.st.com/, componentlink2description=Datasheet, componentlink2url=http://www.st.com/st-web-ui/static/active/en/resource/technical/document/datasheet/DM00141386.pdf, Core="ARM Cortex-M0", DatasheetVersion="Rev. 3", FLASH Size (Prog) (kB)=32, Internal RAM Size (kB)=6, Mounting Technology="Surface Mount", Packing=Tray, PartNumber=STM32F070F6P6

## Free pads (board coordinates)
  round 1 smd: 2(9.675,23.925) 2(38.815,23.32)
  round 3.4 hole 3.4 unplated: MH(4.2,4.2) MH(4.2,50.8) MH(65.8,4.2) MH(65.8,50.8)

## Via types
v1: diameter 0.7, hole 0.3, Top Layer to Bottom Layer, tented both sides, 29 vias

## Nets (pads, with @x,y where several pads share a name; then routed paths per layer and width w, separated by ;. In a path a pad name is that pad's centre, name@x,y a point inside that pad or via, vN(x,y) a via of type N, cw(c..) or ccw(c..) an arc to the next point about the centre after c; other vN are vias at no path point)
+3.3V: 3V3.1 C3.1 C5.1 C6.1 C7.1 C8.1 P4.4 P5.3 R6.1 R8.1 SB1.1 U2.2 U3.5 U3.16 | length 106.2
  Top Layer w0.3: 18.519,11.766 U3.5@18.519,13.242 ; U3.16 18.533,19.056 18.533,20.543 19.166,21.176 19.166,21.916 C5.1
  Top Layer w0.4: 18.519,11.766 18.519,11.346 18.539,11.326
  Top Layer w0.5: v1(10.101,7.791) 8.422,7.791 7.161,9.052 7.161,10.241 ; R8.1 8.006,15.354 7.161,14.509 7.161,10.241 ; SB1.1@10.799,10.201 SB1.1 7.227,10.175 7.161,10.241 ; C7.1 C7.1@18.539,10.554 ; 3V3.1@35.263,8.5 35.263,9.787 ; 35.35,9.715 R6.1
  Top Layer w0.6: C7.1@18.539,10.554 18.539,11.326
  Top Layer w0.65: 34.682,10.368 35.263,9.787
  Top Layer w0.9: P5.3 15.946,5.467 v1(17.049,6.569) 18.505,8.026 C8.1 C7.1 ; v1@19.182,25.032 19.201,25.013 C5.1@19.201,22.001
  Top Layer w1.15: U2.2@32.977,15.259 U2.2@38.777,15.259
  Top Layer w1.3: C3.1 U2.2@32.977,15.259
  Bottom Layer w0.9: v1(19.201,25.032) 19.201,24.528 30.302,13.427 v1(30.302,12.313) 30.39,12.225 32.245,12.225 32.245,10.656 34.137,10.656 34.263,10.529 35.415,10.529 40.082,5.862 P4.4
  Bottom Layer w1: v1(10.101,7.791) 11.323,6.569 v1(17.049,6.569) 25.811,6.569 30.043,10.801 v1(32.252,10.801)
  other v1: 30.353,10.801 34.151,10.801 32.251,12.313 34.15,12.313
+5V: 5V.1 C2.1 P3.1 Q1.1 U1.4 U2.3 | length 62.8
  Top Layer w0.5: U2.3 38.81,17.593 5V.1
  Top Layer w1: U1.4 53.429,11.461 59.149,5.74 P3.1
  Top Layer w1.15: U2.3 C2.1@42.054,17.559
  Top Layer w1.3: Q1.1 28.922,27.748 42.218,27.748 47.872,22.093 47.872,17.491 U1.4 ; C2.1 47.872,17.569
ADC_IN0: A.1 P7.1 R8.2 U3.6 | length 32.4
  Top Layer w0.3: P7.1 8.43,27.575 A.1@9.685,26.32 ; R8.2 12.14,15.547 18.276,15.547 19.164,14.659 19.164,13.256 U3.6
  Bottom Layer w0.3: P7.1 5.733,27.575 14.007,19.301 v1(14.007,15.54)
BOOT0: R10.1 SB1.2 U3.1 | length 6.3
  Top Layer w0.3: R10.1 13.675,11.722 15.199,13.246 U3.1
  Top Layer w0.4: SB1.2 R10.1@11.825,11.697
FAN: Q4.1 R7.1 U3.14 | length 8.9
  Top Layer w0.3: U3.14 19.824,20.275 20.428,20.88 22.896,20.88 23.997,21.981 R7.1
  Top Layer w0.85: R7.1 Q4.1@26.819,21.981
GND: C2.2 C3.2 C4.2 C5.2 C6.2 C7.2 C8.2 D1.2 D2.2 G.1 P4.5 P5.4 P6.6 P7.2 pad.2 Q3.2 Q4.2 R5.2 R7.2 R10.2 U1.3 U2.1 U3.15 | length 3.6
  Top Layer w0.8: R10.2 C4.2@10.5,13.5
  Top Layer w0.9: C5.2 C6.2
  other v1: 30.69,5.034 29.726,5.998 28.762,6.962 21.698,8.6 38.157,11.193 39.488,11.193 8.62,12.872 26.872,14.718 25.908,15.682 18.046,16.643 24.944,16.646 23.831,22.994 11.467,25.653 12.431,26.617 13.395,27.581
I2C_SCL: P5.2 U3.3 | length 11.7
  Top Layer w0.3: P5.2 13.406,6.277 17.224,10.094 U3.3
I2C_SDA: P5.1 U3.2 | length 12.5
  Top Layer w0.3: P5.1 10.866,5.854 16.574,11.561 U3.2
L: P1.1 Q2.2 R1.1 R2.1 U1.1 | length 74.8
  Top Layer w1.1: R2.1 8.924,45.653 8.945,45.675
  Top Layer w1.3: 8.945,45.675 10.247,45.675
  Top Layer w1.5: 17.875,45.675 18.17,45.379
  Top Layer w1.6: 10.247,45.675 17.875,45.675 ; Q2.2 18.17,45.379 21.116,42.434 ; R1.1 21.116,42.434 ; P1.1 58.072,39.422 55.087,36.436 38.206,36.436 31.961,42.682 21.363,42.682 21.116,42.434
N: P1.2 P2.2 U1.2 | length 31.4
  Top Layer w1.5: P1.2 P1.2@53.071,49.311 ; U1.2@53.071,40.862 U1.2
  Bottom Layer w1.6: P2.2 34.794,47.605 41.538,40.861 U1.2 P1.2@53.072,49.31
NetC1_1: C1.1 R2.2 | length 4.5
  Top Layer w1.4: R2.2@6.251,42.753 6.251,39.396 C1.1
NetC1_2: C1.2 P2.1 Q2.1 R4.2 | length 41.3
  Bottom Layer w1.6: C1.2 15.156,40.49 R4.2 15.156,46.66 15.592,47.095 15.592,49.056 Q2.1 15.63,51.817 16.825,53.011 37.766,53.011 39.759,51.018 39.759,49.505 P2.1
NetD1_1: D1.1 R6.2 | length 11
  Top Layer w0.3: R6.2 41.889,9.715 47.877,3.727 47.877,3.011 D1.1
NetD2_1: D2.1 R9.1 | length 5.8
  Top Layer w0.3: D2.1 R9.1
NetP3_2: P3.2 Q4.3 | length 34.5
  Top Layer w0.6: Q4.3 Q4.3@29.558,21.033 ; v1@31.308,21.033 v1(31.31,21.036)
  Top Layer w0.9: Q4.3@29.558,21.033 v1@31.308,21.033
  Bottom Layer w0.6: v1(31.31,21.036) 35.292,21.036 53.192,3.136 P3.2
NetQ1_2: Q1.2 R3.2 | length 10.9
  Top Layer w0.5: R3.2 21.584,26.431 23.878,24.137 27.851,24.137 Q1.2
NetQ1_4: Q1.4 Q2.3 R4.1 | length 24.4
  Bottom Layer w1.6: Q2.3 20.71,47.248 21.506,46.451 R4.1@21.506,43.208 ; R4.1 28.214,43.439 32.278,39.375 Q1.4
NetQ1_6: Q1.6 R1.2 | length 4.9
  Top Layer w1.6: Q1.6 27.466,33.912 R1.2
NetQ3_3: Q3.3 R3.1 | length 7.9
  Top Layer w0.5: Q3.3 12.866,25.348 13.949,26.431 R3.1
NRST: C4.1 P6.5 U3.4 | length 19.7
  Top Layer w0.3: C4.1 v1(13.232,13.525) 14.65,14.943 17.354,14.943 17.864,14.433 17.864,13.256 U3.4
  Bottom Layer w0.3: P6.5 7.248,19.509 v1(13.232,13.525)
PA1: U3.7
PA4: R9.2 U3.10 | length 4
  Top Layer w0.3: U3.10 21.774,11.729 23.526,9.977 R9.2
PA5: P4.3 U3.11 | length 23.4
  Top Layer w0.3: U3.11 21.774,17.543 32.209,7.108 33.57,7.108 P4.3
  Bottom Layer w0.3: P4.3@37.394,3.284 P4.3
PA6: P4.2 U3.12 | length 21.7
  Top Layer w0.3: U3.12 21.124,17.153 21.298,16.979 32.095,6.182 35.002,3.275 P4.2
PA7: P4.1 U3.13 | length 20.9
  Top Layer w0.3: U3.13 20.474,16.78 32.462,4.792 P4.1
PA11: Q3.1 R5.1 U3.17 | length 5.7
  Top Layer w0.3: R5.1 17.431,21.65 17.431,20.774 17.874,20.331 U3.17
  Top Layer w0.4: Q3.1 15.391,23.323 15.641,23.073 15.641,23.048 16.648,22.041 17.265,22.041 R5.1
PA12: U3.18
SWCLK: P6.4 U3.20 | length 12.8
  Top Layer w0.3: P6.4 6.102,19.046 U3.20
SWDIO: P6.3 U3.19 | length 15.5
  Top Layer w0.3: P6.3 6.201,16.605 15.866,16.605 16.574,17.312 U3.19
UART2_RX: P6.1 U3.9 | length 21.4
  Top Layer w0.3: U3.9 21.133,13.237 21.133,10.909 v1(21.711,10.331)
  Bottom Layer w0.3: P6.1 4.173,9.2 20.58,9.2 v1(21.711,10.331)
UART2_TX: P6.2 U3.8 | length 20.2
  Top Layer w0.3: v1(19.678,15.848) 20.474,15.052 U3.8@20.474,13.266
  Bottom Layer w0.3: P6.2 15.718,11.889 v1(19.678,15.848)
pads on no net: Q1.3 Q1.5

## Polygon pours and split planes (outlines as drawn)
+3.3V on Top Layer "+3.3V_L01_P000" (solid, remove dead copper, pour order 0): 29.168,15.915 29.168,10.657 29.169,10.657 29.995,9.831 34.705,9.831 35.181,10.307 35.181,15.542 34.859,15.864
GND on Top Layer "GND_Top" (solid, remove dead copper, pour order 4): 4,0 cw(c4,4) 0,4 0,51 cw(c4,51) 4,55 66,55 cw(c66,51) 70,51 70,4 cw(c66,4) 66,0
+3.3V on Bottom Layer "+3.3V_L02_P005" (solid, remove dead copper, pour order 5): 29.162,14.567 29.162,9.856 35.96,9.856 35.96,14.596
GND on Bottom Layer "GND_Bot" (solid, remove dead copper, pour order 6): 4,0 cw(c4,4) 0,4 0,51 cw(c4,51) 4,55 66,55 cw(c66,51) 70,51 70,4 cw(c66,4) 66,0

## Keep-outs
Keep-Out Layer:
  the board outline again, w0.4

## Other copper
Top Layer:
  pour cut-out: 0.404,36.855 0.404,33.086 6.944,33.086 10.661,29.369 69.558,29.369 69.558,30.57 69.558,54.877 0.381,54.877 0.381,36.855
Bottom Layer:
  pour cut-out: 0.435,36.978 0.435,33.086 6.944,33.086 10.673,29.357 69.589,29.357 69.589,30.693 69.589,55 0.411,55 0.411,36.978

## Silkscreen, mask and mechanical layers (free items; w line width, h text height)
Top Overlay:
  lines w0.4: 0.435,33.086 6.944,33.086 10.673,29.357 69.589,29.357
  text "e" at 34.677,31.01 h15
  text "H" at 11.94,29.457 h7
Bottom Overlay:
  lines w0.4: 0.435,33.086 6.944,33.086 10.673,29.357 69.547,29.357
  text "e" at 10.874,39.646 h10
  text "H" at 53.239,29.558 h25
  text "e" at 68.117,29.28 h15
  text "G" at 7.074,21.498 h1.4
  text "RST" at 8.576,19.204 h1.4
  text "CLK" at 8.646,16.396 h1.4
  text "DIO" at 8.328,14.016 h1.4
  text "TX" at 7.699,11.443 h1.4
  text "RX" at 7.73,8.916 h1.4
  text "SDA" at 11.299,7.805 h1.4 r90
  text "SCL" at 13.839,7.678 h1.4 r90
  text "3V3" at 16.379,7.489 h1.4 r90
  text "3V3" at 40.514,7.489 h1.4 r90
  text "SW" at 37.974,7.186 h1.4 r90
  text "G" at 18.919,6.158 h1.4 r90
  text "A" at 32.894,6.136 h1.4 r90
  text "G" at 43.054,6.158 h1.4 r90
  text "B" at 35.434,6.052 h1.4 r90
  text "-" at 56.995,5.234 h3
  text "+" at 59.796,5.067 h3

## Dimensions
0,51 to 70,51 on Mechanical 15
66,55.127 to 66,0.127 on Mechanical 15